# EAGLE board I2C_LM741_OSC_RevB v6 (EAGLE 9.7.0)
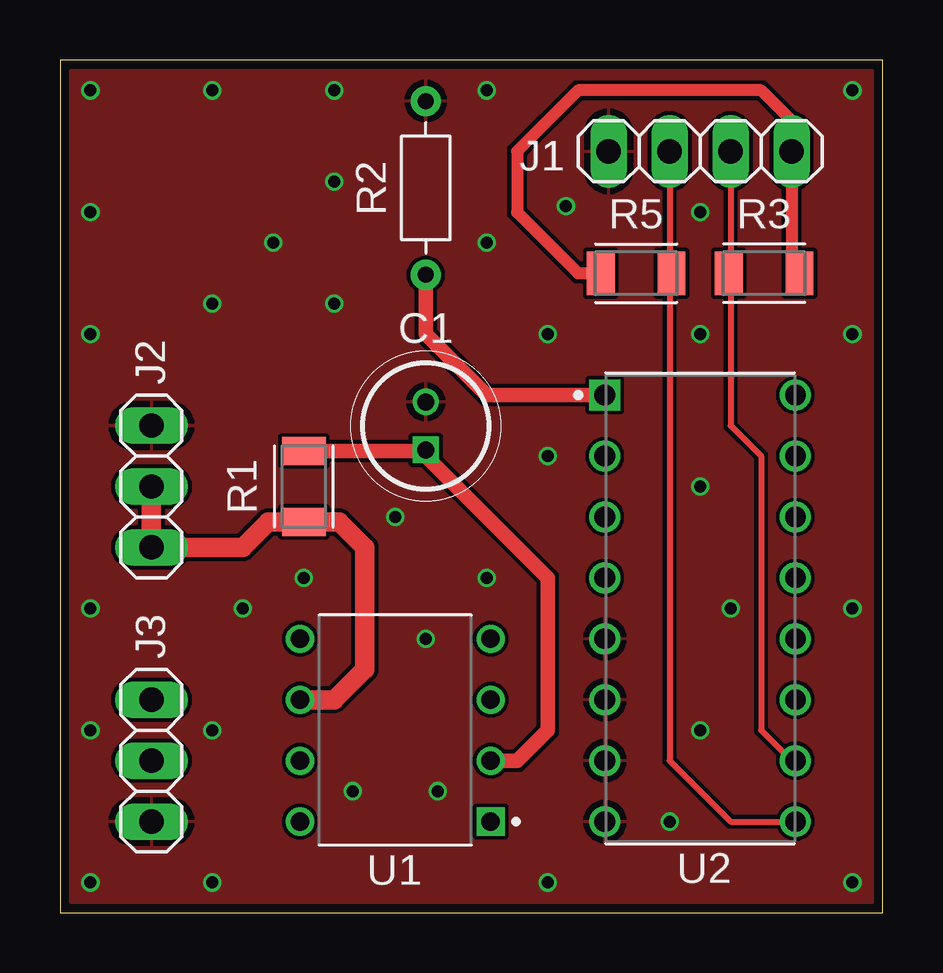
[diagram p0: board, top side]
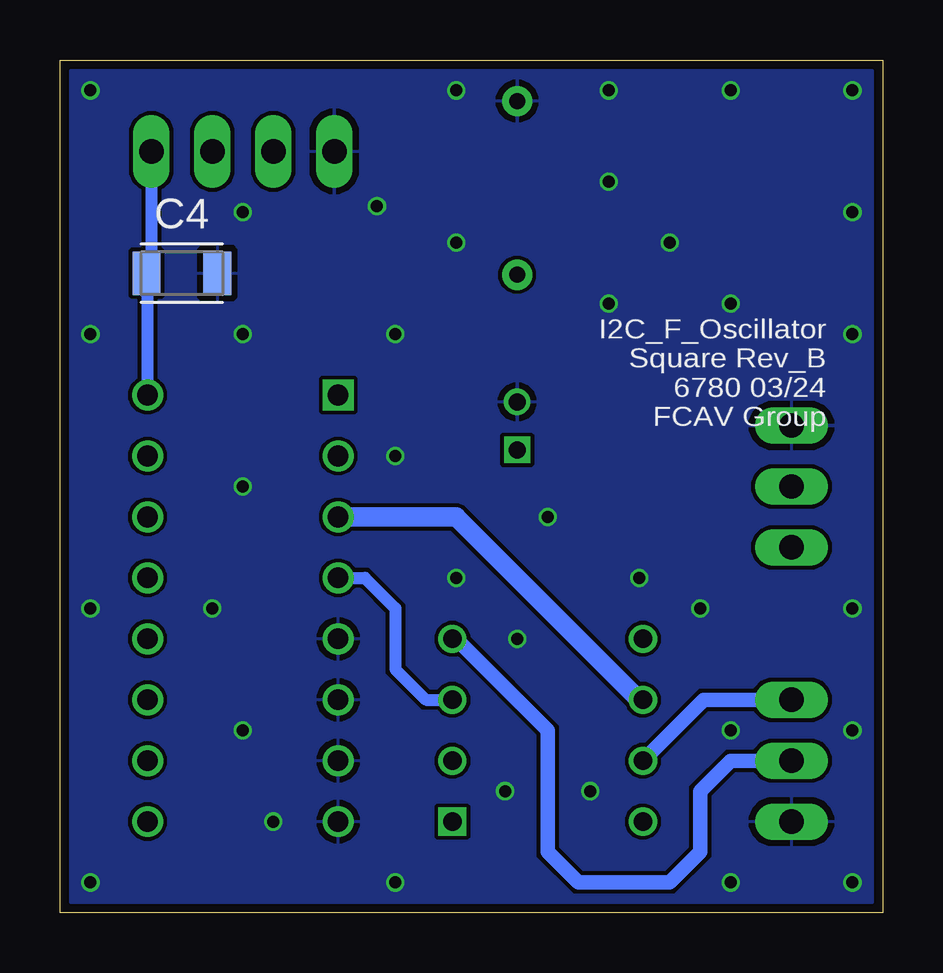
[diagram p1: board, bottom side, seen from below]

Size 34.29 x 35.56 mm. Coordinates in mm from the lower left corner, seen from the top.
Outline: 0,0 34.29,0 34.29,35.56 0,35.56 0,0
Copper layers (1*16): Top / Bottom
Stack-up Default Layer Stack: Top User Defined 0.035559375mm / Dielectric-1 User Defined 1.6mm / Bottom User Defined 0.035559375mm
Design rules: minimum copper width 6mil, minimum drill size 10mil, copper clearance wire_polygon to wire_polygon 6mil, copper clearance wire_polygon to pad_smd 6mil, copper clearance wire_polygon to via 6mil, copper clearance pad_smd to pad_smd 6mil, copper clearance pad_smd to via 6mil, copper clearance via to via 6mil, copper clearance smd to pad (same net) 6mil, copper clearance smd to via (same net) 6mil, copper clearance smd to smd (same net) 6mil, dimension clearance 15mil, restrict clearance 0mil, drill distance 6mil, keepout clearance 0mil

## Footprints (pad centres in the part's own frame; a part is rotated, then mirrored left to right if it is on the bottom)
CAPPRD200W50D525H1250 = drill 0.7 pad 1.1 square: 1 0,0 | drill 0.7 pad 1.1: 2 2,0
CAPC3216X135 = smd 1.165 x 1.815: 1 -1.475,0; 2 1.475,0
1X04 = drill 1.016 long: 1 -3.81,0; 2 -1.27,0; 3 1.27,0; 4 3.81,0
1X03 = drill 1.016 long: 1 -2.54,0; 2 0,0; 3 2.54,0
RESC3216X70 = smd 1.165 x 1.815: 1 -1.475,0; 2 1.475,0
RESAD724W46L381D178B = drill 0.66 pad 1.26: 1 -3.62,0; 2 3.62,0
DIP794W45P254L959H508Q8 = drill 0.78 pad 1.13 square: 1 -3.97,3.81 | drill 0.78 pad 1.13: 2 -3.97,1.27; 3 -3.97,-1.27; 4 -3.97,-3.81; 5 3.97,-3.81; 6 3.97,-1.27; 7 3.97,1.27; 8 3.97,3.81
DIP794W47P254L1943H457Q16 = drill 0.86 pad 1.21 square: 1 -3.97,8.89 | drill 0.86 pad 1.21: 2 -3.97,6.35; 3 -3.97,3.81; 4 -3.97,1.27; 5 -3.97,-1.27; 6 -3.97,-3.81; 7 -3.97,-6.35; 8 -3.97,-8.89; 9 3.97,-8.89; 10 3.97,-6.35; 11 3.97,-3.81; 12 3.97,-1.27; 13 3.97,1.27; 14 3.97,3.81; 15 3.97,6.35; 16 3.97,8.89

## Placement (x,y rotation side)
C1  1uF  [CAPPRD200W50D525H1250]  15.24,19.3 90 top
C4  100nF  [CAPC3216X135]  29.21,26.67 0 bottom
J1  PINHD-1X4  [1X04]  26.67,31.75 180 top
J2  PINHD-1X3  [1X03]  3.81,17.78 90 top
J3  PINHD-1X3  [1X03]  3.81,6.35 270 top
R1  1k  [RESC3216X70]  10.16,17.78 270 top
R2  20k Photo  [RESAD724W46L381D178B]  15.24,30.23 270 top
R3  10k  [RESC3216X70]  29.34,26.67 0 top
R5  10k  [RESC3216X70]  24,26.67 180 top
U1  LM741CN/NOPB  [DIP794W45P254L959H508Q8]  13.97,7.62 180 top
U2  DS18030-050+  [DIP794W47P254L1943H457Q16]  26.67,12.7 0 top

## Library data of the parts
C1 = REA010M2CBK-0511P; DESCRIPTION: Aluminum Electrolytic Capacitors - Radial Leaded 160V 1.0uF 20% 5x11mm; HEIGHT: 12.5mm; MANUFACTURER_NAME: Lelon; MANUFACTURER_PART_NUMBER: REA010M2CBK-0511P; MOUSER_PART_NUMBER: 140-REA1R0M2CBK0511P; MOUSER_PRICE-STOCK: https://www.mouser.co.uk/ProductDetail/Lelon/REA010M2CBK-0511P?qs=tsfqLUzc7IoVZpITlkTcwQ%3D%3D
C4 = Capacitor; CATEGORY: Capacitor
J1 = Connector; CATEGORY: Headers; DESCRIPTION: Header, Straight, 4 Position; MANUFACTURER: Generic; MPN: Generic; OPERATING_TEMPERATURE: Generic; PART_STATUS: Active; PITCH: 0.100" (2.54mm); ROHS_COMPLIANCE: Generic; SERIES: Generic; SUB-CATEGORY: Headers, Male Pins; TYPE: Board to Board or Cable, Unshrouded, Through Hole, Straight
J2 J3 = Connector; CATEGORY: Headers; DESCRIPTION: Header, Straight, 3 Position; MANUFACTURER: Generic; MPN: Generic; OPERATING_TEMPERATURE: Generic; PART_STATUS: Active; PITCH: 0.100" (2.54mm); ROHS_COMPLIANCE: Generic; SERIES: Generic; SUB-CATEGORY: Headers, Male Pins; TYPE: Board to Board or Cable, Unshrouded, Through Hole, Straight
R1-R3 R5 = Resistor; CATEGORY: Resistor; SUB-CATEGORY: Fixed
U1 = LM741CN_NOPB; AVAILABILITY: In Stock; CHECK_PRICES: https://www.snapeda.com/parts/LM741CN/Texas+Instruments/view-part/?ref=eda; DESCRIPTION: Operational Amplifiers - Op Amps Operational Amplifier 8-PDIP 0 to 70; MF: Texas Instruments; MP: LM741CN; PACKAGE: DIP-8 NXP Semiconductors; PRICE: None; PURCHASE-URL: https://www.snapeda.com/api/url_track_click_mouser/?unipart_id=226044&manufacturer=Texas Instruments&part_name=LM741CN&search_term=lm741; SNAPEDA_LINK: https://www.snapeda.com/parts/LM741CN/Texas+Instruments/view-part/?ref=snap
U2 = DS18030-050_; AVAILABILITY: In Stock; CHECK_PRICES: https://www.snapeda.com/parts/DS18030-050+/Maxim+Integrated/view-part/?ref=eda; DESCRIPTION: Digital Potentiometer 50kOhm 256POS Volatile Linear 16-Pin PDIP N Tube; MF: Maxim Integrated Products; MP: DS18030-050+; PACKAGE: None; PRICE: None; SNAPEDA_LINK: https://www.snapeda.com/parts/DS18030-050+/Maxim+Integrated/view-part/?ref=snap

## Nets
+3V3: C4.1 J1.1 R3.2 R5.2 U2.16
+5V: J3.1 U1.7
-5V: J3.2 U1.4
GND: C1.2 C4.2 J1.4 J2.3 J3.3 R2.1 U2.5 U2.6 U2.7 U2.8
H_PHOTO: R2.2 U2.1
IN-: C1.1 R1.1 U1.2
OUT: J2.1 J2.2 R1.2 U1.6 U2.3
SCL: J1.3 R5.1 U2.9
SDA: J1.2 R3.1 U2.10
W_1IN+: U1.3 U2.4

## Tracks (layer width: path | path; a pad name or v marks a point on that pad's centre or on a via)
+3V3
  Top 0.508: R3.2 30.48,26.67 J1.1 30.48,33.02 29.21,34.29 21.59,34.29 19.05,31.75 19.05,29.21 21.59,26.67 R5.2
  Bottom 0.508: J1.1 30.48,26.67 C4.1 30.64,26.62 U2.16
+5V
  Bottom 0.61: J3.1 7.46,8.89 U1.7
-5V
  Bottom 0.61: J3.2 6.35,6.35 7.62,5.08 7.62,2.54 8.89,1.27 12.7,1.27 13.97,2.54 13.97,7.62 17.78,11.43 U1.4
GND  (via drill 0.5)
  other vias: 33.02,1.27 1.27,1.27 1.27,34.29 33.02,34.29 33.02,24.13 20.32,24.13 11.43,25.4 11.43,30.48 1.27,24.13 1.27,12.7 7.62,12.7 33.02,12.7 27.94,12.7 26.67,17.78 26.67,7.62 20.32,1.27 12.19,5.08 15.75,5.08 17.78,13.97 20.32,19.05 17.78,27.94 11.43,34.29 17.78,34.29 25.4,3.81 6.35,25.4 8.89,27.94 1.27,29.21 6.35,34.29 1.27,7.62 13.97,16.51 15.24,11.43 21.08,29.46 26.67,29.21 26.67,24.13 10.16,13.97 6.35,1.27 6.35,7.62
  pour Top: 0,35.56 34.29,35.56 34.29,0 0,0
  pour Bottom: 0,35.56 34.29,35.56 34.29,0 0,0
H_PHOTO
  Top 0.61: U2.1 17.78,21.59 15.24,24.13 R2.2
IN-
  Top 0.61: U1.2 19.05,6.35 20.32,7.62 20.32,13.97 15.24,19.05 C1.1 15.19,19.25 R1.1
OUT
  Top 0.813: U1.6 11.43,8.89 12.7,10.16 12.7,15.24 11.63,16.3 R1.2 8.69,16.3 7.62,15.24 J2.1 J2.2
  Bottom 0.61: 10.16,8.89 U1.6
  Bottom 0.813: U2.3 17.78,16.51 10.16,8.89
SCL
  Top 0.254: J1.3 25.4,26.75 R5.1 25.4,26.59 25.4,6.35 27.94,3.81 U2.9
SDA
  Top 0.254: J1.2 27.94,26.75 R3.1 27.94,26.59 27.94,20.32 29.21,19.05 29.21,7.62 30.48,6.35 U2.10
W_1IN+
  Bottom 0.508: U2.4 21.59,13.97 20.32,12.7 20.32,10.16 19.05,8.89 U1.3

## Text on the board
SilkscreenBottom: I2C_F_Oscillator / Square Rev_B / 6780 03/24 / FCAV Group